# EAGLE board cpu (EAGLE 4.15)

Size 160 x 100 mm. Coordinates in mm from the lower left corner, seen from the top.
Outline: 0,0 160,0 160,100 0,100 0,0
Copper layers (1*16): Top 0.035mm / dielectric 1.5mm / Bottom 0.035mm
Design rules "default": minimum track width 10mil, minimum drill 24mil, track to track 8mil, track to pad 8mil, pad to pad 8mil, via to via 8mil, smd to smd 8mil, copper to edge 40mil, drill to drill 8mil, minimum pad ring 10mil, minimum via ring 8mil, stop-mask expansion 4mil, vias tented up to drill 0mil, thermal gap 10mil

## Footprints (pad centres in the part's own frame; a part is rotated, then mirrored left to right if it is on the bottom)
C0805K = smd 1.3 x 1.6: 1 -1,0; 2 1,0
CAP2.5 = drill 0.813 pad 1.6 octagon: 1 -2.54,0; 2 0,0
C1206 = smd 1.6 x 1.8: 1 -1.4,0; 2 1.4,0
E3,5-10 = drill 0.813 pad 1.6 round: + -1.778,0 | drill 0.813 pad 1.6 octagon: - 1.778,0
UPT = smd 1.27 x 0.762: P$1 0,2.413 | smd 2.54 x 2.667: P$2 0,0
DO214AC = smd 1.8 x 1.7: A 2.05,0; C -2.05,0
SMB = smd 2.4 x 2.4: A 2.2,0; C -2.2,0
SOT23 = smd 1 x 1.4: 1 -0.95,-1.1; 2 0.95,-1.1; 3 0,1.1
T_FILTER = smd 2.54 x 2.54: P$1 0,0 | smd 1.905 x 1.905: P$2 -2.794,0; P$3 2.794,0
CR2032V = drill 1.321 pad 3.15 octagon: + -2.54,-5.08; +@1 -2.54,5.08; - 2.286,0
DIL04B = drill 0.813 octagon: 1 -1.27,-5.08; 2 1.27,-5.08; 3 1.27,5.08; 4 -1.27,5.08
DC_DC_TRACO_1W_DUAL = drill 0.9 round: 1 -5.08,3.81; 2 -2.54,3.81; 3 2.54,3.81; 4 5.08,3.81; 5 7.62,3.81
SO14 = smd 0.66 x 2.032: 1 -3.81,-3.073; 2 -2.54,-3.073; 3 -1.27,-3.073; 4 0,-3.073; 5 1.27,-3.073; 6 2.54,-3.073; 7 3.81,-3.073; 8 3.81,3.073; 9 2.54,3.073; 10 1.27,3.073; 11 0,3.073; 12 -1.27,3.073; 13 -2.54,3.073; 14 -3.81,3.073
TQFP-32 = smd 1.27 x 0.559: 1 -4.293,2.743; 2 -4.293,1.956; 3 -4.293,1.168; 4 -4.293,0.381; 5 -4.293,-0.381; 6 -4.293,-1.168; 7 -4.293,-1.956; 8 -4.293,-2.743; 17 4.293,-2.743; 18 4.293,-1.956; 19 4.293,-1.168; 20 4.293,-0.381; 21 4.293,0.381; 22 4.293,1.168; 23 4.293,1.956; 24 4.293,2.743 | smd 0.559 x 1.27: 9 -2.743,-4.293; 10 -1.956,-4.293; 11 -1.168,-4.293; 12 -0.381,-4.293; 13 0.381,-4.293; 14 1.168,-4.293; 15 1.956,-4.293; 16 2.743,-4.293; 25 2.743,4.293; 26 1.956,4.293; 27 1.168,4.293; 28 0.381,4.293; 29 -0.381,4.293; 30 -1.168,4.293; 31 -1.956,4.293; 32 -2.743,4.293
SO14' = smd 0.6 x 2.2: 1 -3.81,-2.6; 2 -2.54,-2.6; 3 -1.27,-2.6; 4 0,-2.6; 5 1.27,-2.6; 6 2.54,-2.6; 7 3.81,-2.6; 8 3.81,2.6; 9 2.54,2.6; 10 1.27,2.6; 11 0,2.6; 12 -1.27,2.6; 13 -2.54,2.6; 14 -3.81,2.6
SOT23-5 = smd 0.6 x 1.2: 1 -0.95,-1.306; 2 0,-1.306; 3 0.95,-1.306; 4 0.95,1.306; 5 -0.95,1.306
SO16 = smd 0.66 x 2.032: 1 -4.445,-3.073; 2 -3.175,-3.073; 3 -1.905,-3.073; 4 -0.635,-3.073; 5 0.635,-3.073; 6 1.905,-3.073; 7 3.175,-3.073; 8 4.445,-3.073; 9 4.445,3.073; 10 3.175,3.073; 11 1.905,3.073; 12 0.635,3.073; 13 -0.635,3.073; 14 -1.905,3.073; 15 -3.175,3.073; 16 -4.445,3.073
LQFP32 = smd 0.4 x 1.2: 1 -2.8,-4.3; 2 -2,-4.3; 3 -1.2,-4.3; 4 -0.4,-4.3; 5 0.4,-4.3; 6 1.2,-4.3; 7 2,-4.3; 8 2.8,-4.3; 17 2.8,4.3; 18 2,4.3; 19 1.2,4.3; 20 0.4,4.3; 21 -0.4,4.3; 22 -1.2,4.3; 23 -2,4.3; 24 -2.8,4.3 | smd 1.2 x 0.4: 9 4.3,-2.8; 10 4.3,-2; 11 4.3,-1.2; 12 4.3,-0.4; 13 4.3,0.4; 14 4.3,1.2; 15 4.3,2; 16 4.3,2.8; 25 -4.3,2.8; 26 -4.3,2; 27 -4.3,1.2; 28 -4.3,0.4; 29 -4.3,-0.4; 30 -4.3,-1.2; 31 -4.3,-2; 32 -4.3,-2.8
DIL_TRACO_DCDC = drill 0.813 long: 1 -13.97,-7.62; 2 -11.43,-7.62; 3 -8.89,-7.62; 9 6.35,-7.62; 10 8.89,-7.62; 11 11.43,-7.62; 12 13.97,-7.62; 13 13.97,7.62; 14 11.43,7.62; 15 8.89,7.62; 16 6.35,7.62; 22 -8.89,7.62; 23 -11.43,7.62; 24 -13.97,7.62
DIL_NMSC_DCDC = drill 0.813 long: 1 -13.97,-7.62; 2 -11.43,-7.62; 8 3.81,-7.62; 9 6.35,-7.62; 10 8.89,-7.62; 11 11.43,-7.62; 12 13.97,-7.62; 13 13.97,7.62; 14 11.43,7.62; 15 8.89,7.62; 16 6.35,7.62; 17 3.81,7.62; 23 -11.43,7.62; 24 -13.97,7.62
SO-08 = smd 0.6 x 2.2: 1 -1.905,-2.6; 2 -0.635,-2.6; 3 0.635,-2.6; 4 1.905,-2.6; 5 1.905,2.6; 6 0.635,2.6; 7 -0.635,2.6; 8 -1.905,2.6
SO8 = smd 0.6 x 2.2: 1 -1.905,-2.6; 2 -0.635,-2.6; 3 0.635,-2.6; 4 1.905,-2.6; 5 1.905,2.6; 6 0.635,2.6; 7 -0.635,2.6; 8 -1.905,2.6
SO20W = smd 0.66 x 2.032: 1 -5.715,-5.029; 2 -4.445,-5.029; 3 -3.175,-5.029; 4 -1.905,-5.029; 5 -0.635,-5.029; 6 0.635,-5.029; 7 1.905,-5.029; 8 3.175,-5.029; 9 4.445,-5.029; 10 5.715,-5.029; 11 5.715,5.029; 12 4.445,5.029; 13 3.175,5.029; 14 1.905,5.029; 15 0.635,5.029; 16 -0.635,5.029; 17 -1.905,5.029; 18 -3.175,5.029; 19 -4.445,5.029; 20 -5.715,5.029
JP2Q = drill 0.914 octagon: 1 -1.27,-1.27; 2 -1.27,1.27; 3 1.27,-1.27; 4 1.27,1.27
JUMPER3 = drill 0.914 octagon: 1 -2.54,-1.27; 2 0,-1.27; 3 2.54,-1.27
MA03-2 = drill 1.016 round: 1 -2.54,-1.27 | drill 1.016 octagon: 2 -2.54,1.27; 3 0,-1.27; 4 0,1.27; 5 2.54,-1.27; 6 2.54,1.27
JP4 = drill 0.914 long: 1 -3.81,0; 2 -1.27,0; 3 1.27,0; 4 3.81,0
SNR-V = drill 1.3 round: 11 7.62,1.27; 12 2.54,1.27; 14 12.7,1.27 | drill 1 round: A1 -12.7,1.27; A2 -8.89,1.27
GN-A = smd 0.8 x 3.1: 1 -3.835,-2.65; 2 -0.635,-2.65; 3 1.565,-2.65; 4 3.765,-2.65; 5 3.765,2.65; 6 1.565,2.65; 7 -0.635,2.65; 8 -3.835,2.65
C1210 = smd 1.6 x 2.7: 1 -2.67,2.54; 2 0.13,2.54
IND_BLM = smd 1.27 x 1.27: P$1 -1.143,0; P$2 1.143,0
L5650M = smd 1.8 x 4: 1 -2.5,0; 2 2.5,0
CHIPLED_1206 = smd 1.5 x 1.5: A 0,-1.75; C 0,1.75
L02P = drill 1.016 long: 1 1.25,-6.25; 2 -1.25,-6.25
L04P = drill 1.016 long: 1 3.75,-6.25; 2 1.25,-6.25; 3 -1.25,-6.25; 4 -3.75,-6.25
MODU30 = drill 1 square: 1 22.86,-5.08 | drill 1 round: 2 20.32,-5.08; 3 17.78,-5.08; 4 15.24,-5.08; 5 12.7,-5.08; 6 10.16,-5.08; 7 7.62,-5.08; 8 5.08,-5.08; 9 2.54,-5.08; 10 0,-5.08; 11 -2.54,-5.08; 12 -5.08,-5.08; 13 -7.62,-5.08; 14 -10.16,-5.08; 15 -12.7,-5.08; 16 22.86,-2.54; 17 20.32,-2.54; 18 17.78,-2.54; 19 15.24,-2.54; 20 12.7,-2.54; 21 10.16,-2.54; 22 7.62,-2.54; 23 5.08,-2.54; 24 2.54,-2.54; 25 0,-2.54; 26 -2.54,-2.54; 27 -5.08,-2.54; 28 -7.62,-2.54; 29 -10.16,-2.54; 30 -12.7,-2.54
90-2 = drill 1.422 long: 1 -1.75,5.25; 2 1.75,5.25
MODU16 = drill 1 square: P$1 13.97,-5.08 | drill 1 round: P$2 11.43,-5.08; P$3 8.89,-5.08; P$4 6.35,-5.08; P$5 3.81,-5.08; P$6 1.27,-5.08; P$7 -1.27,-5.08; P$8 -3.81,-5.08; P$13 13.97,-2.54; P$14 11.43,-2.54; P$15 8.89,-2.54; P$16 6.35,-2.54; P$17 3.81,-2.54; P$18 1.27,-2.54; P$19 -1.27,-2.54; P$20 -3.81,-2.54
MODU44 = drill 1 square: P$1 0,0 | drill 1 round: P$2 -2.54,0; P$3 -5.08,0; P$4 -7.62,0; P$5 -10.16,0; P$6 -12.7,0; P$7 -15.24,0; P$8 -17.78,0; P$9 -20.32,0; P$10 -22.86,0; P$11 -25.4,0; P$12 -27.94,0; P$13 -30.48,0; P$14 -33.02,0; P$15 -35.56,0; P$16 -38.1,0; P$17 -40.64,0; P$18 -43.18,0; P$19 -45.72,0; P$20 -48.26,0; P$21 -50.8,0; P$22 -53.34,0; P$23 0,2.54; P$24 -2.54,2.54; P$25 -5.08,2.54; P$26 -7.62,2.54; P$27 -10.16,2.54; P$28 -12.7,2.54; P$29 -15.24,2.54; P$30 -17.78,2.54; P$31 -20.32,2.54; P$32 -22.86,2.54; P$33 -25.4,2.54; P$34 -27.94,2.54; P$35 -30.48,2.54; P$36 -33.02,2.54; P$37 -35.56,2.54; P$38 -38.1,2.54; P$39 -40.64,2.54; P$40 -43.18,2.54; P$41 -45.72,2.54; P$42 -48.26,2.54; P$43 -50.8,2.54; P$44 -53.34,2.54
AMP390113-1 = smd 0.5 x 2: 1 -30.5,-12.99; 2 -29.7,-12.99; 3 -28.9,-12.99; 4 -28.1,-12.99; 5 -27.3,-12.99; 6 -26.5,-12.99; 7 -25.7,-12.99; 8 -24.9,-12.99; 9 -24.1,-12.99; 10 -23.3,-12.99; 11 -22.5,-12.99; 12 -21.7,-12.99; 13 -20.9,-12.99; 14 -20.1,-12.99; 15 -19.3,-12.99; 16 -18.5,-12.99; 17 -17.7,-12.99; 18 -16.9,-12.99; 19 -16.1,-12.99; 20 -15.3,-12.99; 21 -14.5,-12.99; 22 -13.7,-12.99; 23 -12.9,-12.99; 24 -12.1,-12.99; 25 -11.3,-12.99; 26 -10.5,-12.99; 27 -9.7,-12.99; 28 -8.9,-12.99; 29 -8.1,-12.99; 30 -7.3,-12.99; 31 -2.7,-12.99; 32 -1.9,-12.99; 33 -1.1,-12.99; 34 -0.3,-12.99; 35 0.5,-12.99; 36 1.3,-12.99; 37 2.1,-12.99; 38 2.9,-12.99; 39 3.7,-12.99; 40 4.5,-12.99; 41 5.3,-12.99; 42 6.1,-12.99; 43 6.9,-12.99; 44 7.7,-12.99; 45 8.5,-12.99; 46 9.3,-12.99; 47 10.1,-12.99; 48 10.9,-12.99; 49 11.7,-12.99; 50 12.5,-12.99; 51 13.3,-12.99; 52 14.1,-12.99; 53 14.9,-12.99; 54 15.7,-12.99; 55 16.5,-12.99; 56 17.3,-12.99; 57 18.1,-12.99; 58 18.9,-12.99; 59 19.7,-12.99; 60 20.5,-12.99; 61 21.3,-12.99; 62 22.1,-12.99; 63 22.9,-12.99; 64 23.7,-12.99; 65 24.5,-12.99; 66 25.3,-12.99; 67 26.1,-12.99; 68 26.9,-12.99; 69 27.7,-12.99; 70 28.5,-12.99; 71 29.3,-12.99; 72 30.1,-12.99; 73 -30.1,-4.79; 74 -29.3,-4.79; 75 -28.5,-4.79; 76 -27.7,-4.79; 77 -26.9,-4.79; 78 -26.1,-4.79; 79 -25.3,-4.79; 80 -24.5,-4.79; 81 -23.7,-4.79; 82 -22.9,-4.79; 83 -22.1,-4.79; 84 -21.3,-4.79; 85 -20.5,-4.79; 86 -19.7,-4.79; 87 -18.9,-4.79; 88 -18.1,-4.79; 89 -17.3,-4.79; 90 -16.5,-4.79; 91 -15.7,-4.79; 92 -14.9,-4.79; 93 -14.1,-4.79; 94 -13.3,-4.79; 95 -12.5,-4.79; 96 -11.7,-4.79; 97 -10.9,-4.79; 98 -10.1,-4.79; 99 -9.3,-4.79; 100 -8.5,-4.79; 101 -7.7,-4.79; 102 -6.9,-4.79; 103 -2.3,-4.79; 104 -1.5,-4.79; 105 -0.7,-4.79; 106 0.1,-4.79; 107 0.9,-4.79; 108 1.7,-4.79; 109 2.5,-4.79; 110 3.3,-4.79; 111 4.1,-4.79; 112 4.9,-4.79; 113 5.7,-4.79; 114 6.5,-4.79; 115 7.3,-4.79; 116 8.1,-4.79; 117 8.9,-4.79; 118 9.7,-4.79; 119 10.5,-4.79; 120 11.3,-4.79; 121 12.1,-4.79; 122 12.9,-4.79; 123 13.7,-4.79; 124 14.5,-4.79; 125 15.3,-4.79; 126 16.1,-4.79; 127 16.9,-4.79; 128 17.7,-4.79; 129 18.5,-4.79; 130 19.3,-4.79; 131 20.1,-4.79; 132 20.9,-4.79; 133 21.7,-4.79; 134 22.5,-4.79; 135 23.3,-4.79; 136 24.1,-4.79; 137 24.9,-4.79; 138 25.7,-4.79; 139 26.5,-4.79; 140 27.3,-4.79; 141 28.1,-4.79; 142 28.9,-4.79; 143 29.7,-4.79; 144 30.5,-4.79 | hole 1.6: -31.5,-8.89 | hole 1.1: 31.5,-8.89
SOT-23 = smd 0.787 x 0.889: 1 0.025,-1.016; 2 -0.94,1.016; 3 0.991,1.016
SO8-2 = smd 0.61 x 1.626: 1 -2.54,-2.54; 2 -1.27,-2.54; 3 0,-2.54; 4 1.27,-2.54; 5 1.27,3.81; 6 0,3.81; 7 -1.27,3.81; 8 -2.54,3.81
DPAK = smd 1.6 x 2.997: 1 -2.261,-4.928; 3 2.21,-4.928 | smd 4.826 x 4.191: 4 0,3.353
R0805W = smd 1.5 x 1: 1 -0.94,0; 2 0.94,0
R2010W = smd 2 x 1.8: 1 -2.311,0; 2 2.311,0
NS9360 = smd 0.762 x 0.762: A1 0,0; A2 0,-1.27; A3 0,-2.54; A4 0,-3.81; A5 0,-5.08; A6 0,-6.35; A7 0,-7.62; A8 0,-8.89; A9 0,-10.16; A10 0,-11.43; A11 0,-12.7; A12 0,-13.97; A13 0,-15.24; A14 0,-16.51; A15 0,-17.78; A16 0,-19.05; A17 0,-20.32; A18 0,-21.59; A19 0,-22.86; A20 0,-24.13; B1 -1.27,0; B2 -1.27,-1.27; B3 -1.27,-2.54; B4 -1.27,-3.81; B5 -1.27,-5.08; B6 -1.27,-6.35; B7 -1.27,-7.62; B8 -1.27,-8.89; B9 -1.27,-10.16; B10 -1.27,-11.43; B11 -1.27,-12.7; B12 -1.27,-13.97; B13 -1.27,-15.24; B14 -1.27,-16.51; B15 -1.27,-17.78; B16 -1.27,-19.05; B17 -1.27,-20.32; B18 -1.27,-21.59; B19 -1.27,-22.86; B20 -1.27,-24.13; C1 -2.54,0; C2 -2.54,-1.27; C3 -2.54,-2.54; C4 -2.54,-3.81; C5 -2.54,-5.08; C6 -2.54,-6.35; C7 -2.54,-7.62; C8 -2.54,-8.89; C9 -2.54,-10.16; C10 -2.54,-11.43; C11 -2.54,-12.7; C12 -2.54,-13.97; C13 -2.54,-15.24; C14 -2.54,-16.51; C15 -2.54,-17.78; C16 -2.54,-19.05; C17 -2.54,-20.32; C18 -2.54,-21.59; C19 -2.54,-22.86; C20 -2.54,-24.13; D1 -3.81,0; D2 -3.81,-1.27; D3 -3.81,-2.54; D4 -3.81,-3.81; D5 -3.81,-5.08; D6 -3.81,-6.35; D7 -3.81,-7.62; D8 -3.81,-8.89; D9 -3.81,-10.16; D10 -3.81,-11.43; D11 -3.81,-12.7; D12 -3.81,-13.97; D13 -3.81,-15.24; D14 -3.81,-16.51; D15 -3.81,-17.78; D16 -3.81,-19.05; D17 -3.81,-20.32; D18 -3.81,-21.59; D19 -3.81,-22.86; D20 -3.81,-24.13; E1 -5.08,0; E2 -5.08,-1.27; E3 -5.08,-2.54; E4 -5.08,-3.81; E17 -5.08,-20.32; E18 -5.08,-21.59; E19 -5.08,-22.86; E20 -5.08,-24.13; F1 -6.35,0; F2 -6.35,-1.27; F3 -6.35,-2.54; F4 -6.35,-3.81; F17 -6.35,-20.32; F18 -6.35,-21.59; F19 -6.35,-22.86; F20 -6.35,-24.13; G1 -7.62,0; G2 -7.62,-1.27; G3 -7.62,-2.54; G4 -7.62,-3.81; G17 -7.62,-20.32; G18 -7.62,-21.59; G19 -7.62,-22.86; G20 -7.62,-24.13; H1 -8.89,0; H2 -8.89,-1.27; H3 -8.89,-2.54; H4 -8.89,-3.81; H17 -8.89,-20.32; H18 -8.89,-21.59; H19 -8.89,-22.86; H20 -8.89,-24.13; J1 -10.16,0; J2 -10.16,-1.27; J3 -10.16,-2.54; J4 -10.16,-3.81; J9 -10.16,-10.16; J10 -10.16,-11.43; J11 -10.16,-12.7; J12 -10.16,-13.97; J17 -10.16,-20.32; J18 -10.16,-21.59; J19 -10.16,-22.86; J20 -10.16,-24.13; K1 -11.43,0; K2 -11.43,-1.27; K3 -11.43,-2.54; K4 -11.43,-3.81; K9 -11.43,-10.16; K10 -11.43,-11.43; K11 -11.43,-12.7; K12 -11.43,-13.97; K17 -11.43,-20.32; K18 -11.43,-21.59; K19 -11.43,-22.86; K20 -11.43,-24.13; L1 -12.7,0; L2 -12.7,-1.27; L3 -12.7,-2.54; L4 -12.7,-3.81; L9 -12.7,-10.16; L10 -12.7,-11.43; L11 -12.7,-12.7; L12 -12.7,-13.97; L17 -12.7,-20.32; L18 -12.7,-21.59; L19 -12.7,-22.86; L20 -12.7,-24.13; M1 -13.97,0; M2 -13.97,-1.27; M3 -13.97,-2.54; M4 -13.97,-3.81; M9 -13.97,-10.16; M10 -13.97,-11.43; M11 -13.97,-12.7; M12 -13.97,-13.97; M17 -13.97,-20.32; M18 -13.97,-21.59; M19 -13.97,-22.86; M20 -13.97,-24.13; N1 -15.24,0; N2 -15.24,-1.27; N3 -15.24,-2.54; N4 -15.24,-3.81; N17 -15.24,-20.32; N18 -15.24,-21.59; N19 -15.24,-22.86; N20 -15.24,-24.13; P1 -16.51,0; P2 -16.51,-1.27; P3 -16.51,-2.54; P4 -16.51,-3.81; P17 -16.51,-20.32; P18 -16.51,-21.59; P19 -16.51,-22.86; P20 -16.51,-24.13; R1 -17.78,0; R2 -17.78,-1.27; R3 -17.78,-2.54; R4 -17.78,-3.81; R17 -17.78,-20.32; R18 -17.78,-21.59; R19 -17.78,-22.86; R20 -17.78,-24.13; T1 -19.05,0; T2 -19.05,-1.27; T3 -19.05,-2.54; T4 -19.05,-3.81; T17 -19.05,-20.32; T18 -19.05,-21.59; T19 -19.05,-22.86; T20 -19.05,-24.13; U1 -20.32,0; U2 -20.32,-1.27; U3 -20.32,-2.54; U4 -20.32,-3.81; U5 -20.32,-5.08; U6 -20.32,-6.35; U7 -20.32,-7.62; U8 -20.32,-8.89; U9 -20.32,-10.16; U10 -20.32,-11.43; U11 -20.32,-12.7; U12 -20.32,-13.97; U13 -20.32,-15.24; U14 -20.32,-16.51; U15 -20.32,-17.78; U16 -20.32,-19.05; U17 -20.32,-20.32; U18 -20.32,-21.59; U19 -20.32,-22.86; U20 -20.32,-24.13; V1 -21.59,0; V2 -21.59,-1.27; V3 -21.59,-2.54; V4 -21.59,-3.81; V5 -21.59,-5.08; V6 -21.59,-6.35; V7 -21.59,-7.62; V8 -21.59,-8.89; V9 -21.59,-10.16; V10 -21.59,-11.43; V11 -21.59,-12.7; V12 -21.59,-13.97; V13 -21.59,-15.24; V14 -21.59,-16.51; V15 -21.59,-17.78; V16 -21.59,-19.05; V17 -21.59,-20.32; V18 -21.59,-21.59; V19 -21.59,-22.86; V20 -21.59,-24.13; W1 -22.86,0; W2 -22.86,-1.27; W3 -22.86,-2.54; W4 -22.86,-3.81; W5 -22.86,-5.08; W6 -22.86,-6.35; W7 -22.86,-7.62; W8 -22.86,-8.89; W9 -22.86,-10.16; W10 -22.86,-11.43; W11 -22.86,-12.7; W12 -22.86,-13.97; W13 -22.86,-15.24; W14 -22.86,-16.51; W15 -22.86,-17.78; W16 -22.86,-19.05; W17 -22.86,-20.32; W18 -22.86,-21.59; W19 -22.86,-22.86; W20 -22.86,-24.13; Y1 -24.13,0; Y2 -24.13,-1.27; Y3 -24.13,-2.54; Y4 -24.13,-3.81; Y5 -24.13,-5.08; Y6 -24.13,-6.35; Y7 -24.13,-7.62; Y8 -24.13,-8.89; Y9 -24.13,-10.16; Y10 -24.13,-11.43; Y11 -24.13,-12.7; Y12 -24.13,-13.97; Y13 -24.13,-15.24; Y14 -24.13,-16.51; Y15 -24.13,-17.78; Y16 -24.13,-19.05; Y17 -24.13,-20.32; Y18 -24.13,-21.59; Y19 -24.13,-22.86; Y20 -24.13,-24.13
MURATA_RESONATOR = smd 0.8 x 2.6: 1 -1.5,0; 2 0,0; 3 1.5,0
MM20SS = smd 1.27 x 1.88: 1 -2.794,-1.524; 2 2.794,-1.524; 3 2.794,1.524; 4 -2.794,1.524

## Placement (x,y rotation side)
C1  100n  [C0805K]  not placed on the board
C2  100n  [C0805K]  not placed on the board
C3  100n  [C0805K]  not placed on the board
C4  100n  [C0805K]  not placed on the board
C5  100n  [C0805K]  not placed on the board
C6  100n  [C0805K]  not placed on the board
C7  100n  [C0805K]  not placed on the board
C8  47u/25V  [CAP2.5]  not placed on the board
C9  100n  [C0805K]  not placed on the board
C10  100n  [C0805K]  not placed on the board
C11  100n  [C1206]  not placed on the board
C12  NM  [C0805K]  not placed on the board
C13  100n  [C0805K]  not placed on the board
C14  47u/25V  [CAP2.5]  not placed on the board
C15  47u/25V  [CAP2.5]  not placed on the board
C16  100n  [C0805K]  not placed on the board
C17  100n  [C0805K]  not placed on the board
C18  100n  [C0805K]  not placed on the board
C19  1u0  [C0805K]  not placed on the board
C20  100n  [C1206]  not placed on the board
C21  100n  [C1206]  not placed on the board
C22  100n  [C1206]  not placed on the board
C23  100n  [C0805K]  not placed on the board
C24  100n  [C0805K]  not placed on the board
C25  47u/25V  [CAP2.5]  not placed on the board
C26  100n  [C0805K]  not placed on the board
C27  47u/50V  [CAP2.5]  not placed on the board
C28  100n  [C0805K]  not placed on the board
C29  100n  [C0805K]  not placed on the board
C30  100n  [C0805K]  not placed on the board
C31  100n  [C1206]  not placed on the board
C32  100n  [C0805K]  not placed on the board
C33  100n  [C0805K]  not placed on the board
C34  100n  [C0805K]  not placed on the board
C35  100n  [C0805K]  not placed on the board
C36  100n  [C0805K]  not placed on the board
C37  100n  [C0805K]  not placed on the board
C38  100n  [C0805K]  not placed on the board
C39  100n  [C1206]  not placed on the board
C40  100n  [C0805K]  not placed on the board
C41  47u/25V  [CAP2.5]  not placed on the board
C42  100n  [C1206]  not placed on the board
C43  100n  [C0805K]  not placed on the board
C44  NM  [C1206]  not placed on the board
C45  330uF  [E3,5-10]  not placed on the board
C46  180uF  [E3,5-10]  not placed on the board
C47  100n  [C0805K]  not placed on the board
C48  100n  [C0805K]  not placed on the board
C49  47u/25V  [CAP2.5]  not placed on the board
C50  470p  [C1206]  not placed on the board
C51  100n  [C0805K]  not placed on the board
C52  220p  [C1206]  not placed on the board
C53  470p  [C1206]  not placed on the board
C54  100p  [C1206]  not placed on the board
C55  100n  [C0805K]  not placed on the board
C57  NM  [C0805K]  not placed on the board
C58  NM  [C0805K]  not placed on the board
C59  100n  [C0805K]  not placed on the board
C60  470n  [C0805K]  not placed on the board
C61  NM  [C0805K]  not placed on the board
C62  100p  [C0805K]  not placed on the board
C63  1u0  [C0805K]  not placed on the board
C64  1u0  [C0805K]  not placed on the board
C65  100p  [C0805K]  not placed on the board
C66  100n  [C0805K]  not placed on the board
C67  100n  [C0805K]  not placed on the board
C68  100n  [C0805K]  not placed on the board
C69  100n  [C0805K]  not placed on the board
C70  100n  [C0805K]  not placed on the board
C71  100n  [C0805K]  not placed on the board
C72  1u0  [C0805K]  not placed on the board
C73  1u0  [C0805K]  not placed on the board
C74  100p  [C0805K]  not placed on the board
C75  100p  [C0805K]  not placed on the board
C76  100n  [C0805K]  not placed on the board
C77  NM  [C0805K]  not placed on the board
C78  100n  [C0805K]  not placed on the board
C79  NM  [C0805K]  not placed on the board
C80  470n  [C0805K]  not placed on the board
D1  UPT  [UPT]  not placed on the board
D2  UPT  [UPT]  not placed on the board
D3  S1K  [DO214AC]  not placed on the board
D4  SM6T  [SMB]  not placed on the board
D5  BZX84-C12  [SOT23]  not placed on the board
D6  S1K  [DO214AC]  not placed on the board
D7  S1K  [DO214AC]  not placed on the board
D8  S1K  [DO214AC]  not placed on the board
D9  S1K  [DO214AC]  not placed on the board
D10  S1K  [DO214AC]  not placed on the board
D11  S1K  [DO214AC]  not placed on the board
D12  S1K  [DO214AC]  not placed on the board
D13  UPT  [UPT]  not placed on the board
D14  SM6T  [SMB]  not placed on the board
D15  SM6T  [SMB]  not placed on the board
D16  SM6T  [SMB]  not placed on the board
D17  SM6T  [SMB]  not placed on the board
D18  BAS16  [SOT23]  not placed on the board
D19  UPT  [UPT]  not placed on the board
D20  SM6T  [SMB]  not placed on the board
D21  SM6T  [SMB]  not placed on the board
D22  BAS16  [SOT23]  not placed on the board
D23  BAS16  [SOT23]  not placed on the board
D24  SM6T  [SMB]  not placed on the board
D25  BAS16  [SOT23]  not placed on the board
D26  BAS16  [SOT23]  not placed on the board
D27  BAS16  [SOT23]  not placed on the board
D28  BAS16  [SOT23]  not placed on the board
D29  BAS16  [SOT23]  not placed on the board
D30  SM6T  [SMB]  not placed on the board
F1  [T_FILTER]  not placed on the board
F2  [T_FILTER]  not placed on the board
F3  [T_FILTER]  not placed on the board
F4  [T_FILTER]  not placed on the board
G1  CR2032V  [CR2032V]  not placed on the board
IC1  SFH617G  [DIL04B]  not placed on the board
IC2  SFH617G  [DIL04B]  not placed on the board
IC3  SFH617G  [DIL04B]  not placed on the board
IC4  SFH617G  [DIL04B]  not placed on the board
IC5  DC_DC_TRACO_1W_DUAL  [DC_DC_TRACO_1W_DUAL]  not placed on the board
IC6  74HCT14D  [SO14]  not placed on the board
IC7  SFH617G  [DIL04B]  not placed on the board
IC8  ATMEGA8_TQFP  [TQFP-32]  not placed on the board
IC9  SFH617G  [DIL04B]  not placed on the board
IC10  OP747AR  [SO14']  not placed on the board
IC11  74HCT14D  [SO14]  not placed on the board
IC12  LM4120  [SOT23-5]  not placed on the board
IC13  74HC02D  [SO14]  not placed on the board
IC14  74HCT14D  [SO14]  not placed on the board
IC15  MAX232A  [SO16]  not placed on the board
IC16  MAX232A  [SO16]  not placed on the board
IC17  FT232BM  [LQFP32]  not placed on the board
IC18  DC_DC_TRACO_8W  [DIL_TRACO_DCDC]  not placed on the board
IC19  DC_DC_NMSC  [DIL_NMSC_DCDC]  not placed on the board
IC20  74HCT253D  [SO16]  not placed on the board
IC21  93LC66SN  [SO-08]  not placed on the board
IC22  LTC1622  [SO8]  not placed on the board
IC23  M41T81  [SO8]  not placed on the board
IC24  74HCT573D  [SO20W]  not placed on the board
IC27  ATMEGA8_TQFP  [TQFP-32]  not placed on the board
IC28  OP747R  [SO14']  not placed on the board
IC29  LM339D  [SO14']  not placed on the board
IC30  24AA64SN  [SO-08]  not placed on the board
J1  [JP2Q]  not placed on the board
J2  JUMPER3  [JUMPER3]  not placed on the board
J3  [MA03-2]  not placed on the board
J4  JUMPER3  [JUMPER3]  not placed on the board
J5  JUMPER3  [JUMPER3]  not placed on the board
J6  [JP4]  not placed on the board
J7  [JP4]  not placed on the board
J8  [MA03-2]  not placed on the board
K2  SNR03024  [SNR-V]  not placed on the board
K4  SNR03024  [SNR-V]  not placed on the board
K5  GN200A1H  [GN-A]  not placed on the board
K6  GN200A1H  [GN-A]  not placed on the board
L1  L1210  [C1210]  not placed on the board
L2  IND_BLM  [IND_BLM]  not placed on the board
L3  L1210  [C1210]  not placed on the board
L4  IND_BLM  [IND_BLM]  not placed on the board
L5  IND_BLM  [IND_BLM]  not placed on the board
L6  IND_BLM  [IND_BLM]  not placed on the board
L7  IND_BLM  [IND_BLM]  not placed on the board
L8  IND_BLM  [IND_BLM]  not placed on the board
L9  IND_BLM  [IND_BLM]  not placed on the board
L10  L1210  [C1210]  not placed on the board
L11  [L5650M]  not placed on the board
L12  L1210  [C1210]  not placed on the board
LED1  [CHIPLED_1206]  not placed on the board
LED2  [CHIPLED_1206]  not placed on the board
P1  [L02P]  not placed on the board
P2  [L04P]  not placed on the board
P3  [MODU30]  not placed on the board
P4  [90-2]  not placed on the board
P5  [MODU16]  not placed on the board
P6  [MODU44]  not placed on the board
P7  AMP390113-1  [AMP390113-1]  not placed on the board
P8  [MODU16]  not placed on the board
Q1  BSS123  [SOT23]  not placed on the board
Q2  BSS123  [SOT23]  not placed on the board
Q3  IRF7471  [SO8]  not placed on the board
Q4  BC847  [SOT-23]  not placed on the board
Q5  IRF7103  [SO8-2]  not placed on the board
Q6  IRF7103  [SO8-2]  not placed on the board
Q7  IRF7471  [SO8]  not placed on the board
Q8  IRF7103  [SO8-2]  not placed on the board
Q9  IRFR5305  [DPAK]  not placed on the board
Q10  BSS123  [SOT23]  not placed on the board
Q11  BSS123  [SOT23]  not placed on the board
Q12  FDV304P  [SOT23]  not placed on the board
Q13  BSS123  [SOT23]  not placed on the board
Q14  BSS123  [SOT23]  not placed on the board
Q15  IRF7422  [SO8]  not placed on the board
Q29  BSS123  [SOT23]  not placed on the board
Q30  BSS123  [SOT23]  not placed on the board
Q31  BSS123  [SOT23]  not placed on the board
Q32  BSS123  [SOT23]  not placed on the board
R1  470R  [R0805W]  not placed on the board
R2  470R  [R0805W]  not placed on the board
R3  2K21  [R0805W]  not placed on the board
R4  10k  [R0805W]  not placed on the board
R5  10k  [R0805W]  not placed on the board
R7  0R  [R0805W]  not placed on the board
R8  0R  [R0805W]  not placed on the board
R9  [R0805W]  not placed on the board
R11  0R  [R0805W]  not placed on the board
R13  100R  [R0805W]  not placed on the board
R14  10K  [R0805W]  not placed on the board
R15  10K  [R0805W]  not placed on the board
R16  100R  [R0805W]  not placed on the board
R17  10K  [R0805W]  not placed on the board
R18  100R  [R0805W]  not placed on the board
R19  4K75  [R0805W]  not placed on the board
R20  100R  [R0805W]  not placed on the board
R21  2K21  [R0805W]  not placed on the board
R22  2K21  [R0805W]  not placed on the board
R23  470R  [R0805W]  not placed on the board
R24  10k  [R0805W]  not placed on the board
R25  10k  [R0805W]  not placed on the board
R26  10k  [R0805W]  not placed on the board
R27  0R  [R0805W]  not placed on the board
R28  [R0805W]  not placed on the board
R29  470R  [R0805W]  not placed on the board
R30  100k  [R0805W]  not placed on the board
R31  1K  [R0805W]  not placed on the board
R32  2K21  [R0805W]  not placed on the board
R33  10k  [R0805W]  not placed on the board
R34  10k  [R0805W]  not placed on the board
R35  10k  [R0805W]  not placed on the board
R36  470R  [R0805W]  not placed on the board
R37  10k  [R0805W]  not placed on the board
R38  100R  [R0805W]  not placed on the board
R39  100R  [R0805W]  not placed on the board
R40  1K  [R0805W]  not placed on the board
R41  1K  [R0805W]  not placed on the board
R42  10k  [R0805W]  not placed on the board
R43  2K21  [R0805W]  not placed on the board
R44  3K3  [R0805W]  not placed on the board
R45  1K  [R0805W]  not placed on the board
R46  100R  [R0805W]  not placed on the board
R47  10k  [R0805W]  not placed on the board
R48  1k  [R0805W]  not placed on the board
R49  10K  [R0805W]  not placed on the board
R50  10k  [R0805W]  not placed on the board
R51  [R0805W]  not placed on the board
R52  2k2  [R0805W]  not placed on the board
R53  2K21  [R0805W]  not placed on the board
R54  100R  [R0805W]  not placed on the board
R55  1K  [R0805W]  not placed on the board
R56  220K  [R0805W]  not placed on the board
R57  220K  [R0805W]  not placed on the board
R58  10k  [R0805W]  not placed on the board
R59  470R  [R0805W]  not placed on the board
R60  10K  [R0805W]  not placed on the board
R61  4K75  [R0805W]  not placed on the board
R62  4K75  [R0805W]  not placed on the board
R63  4K75  [R0805W]  not placed on the board
R64  4K75  [R0805W]  not placed on the board
R65  10k  [R0805W]  not placed on the board
R66  100R  [R0805W]  not placed on the board
R67  220K  [R0805W]  not placed on the board
R68  1K  [R0805W]  not placed on the board
R69  1K  [R0805W]  not placed on the board
R70  220K  [R0805W]  not placed on the board
R71  100R  [R0805W]  not placed on the board
R72  100R  [R0805W]  not placed on the board
R73  1K  [R0805W]  not placed on the board
R74  1K  [R0805W]  not placed on the board
R75  220K  [R0805W]  not placed on the board
R76  220K  [R0805W]  not placed on the board
R77  1K  [R0805W]  not placed on the board
R78  100R  [R0805W]  not placed on the board
R79  137R  [R0805W]  not placed on the board
R80  10k  [R0805W]  not placed on the board
R81  1K  [R0805W]  not placed on the board
R82  137R  [R0805W]  not placed on the board
R83  100R  [R0805W]  not placed on the board
R84  1K  [R0805W]  not placed on the board
R85  1K  [R0805W]  not placed on the board
R86  1k  [R0805W]  not placed on the board
R87  1k  [R0805W]  not placed on the board
R88  100R  [R0805W]  not placed on the board
R89  10k  [R0805W]  not placed on the board
R90  10k  [R0805W]  not placed on the board
R91  470R  [R0805W]  not placed on the board
R92  1k5  [R0805W]  not placed on the board
R93  27R  [R0805W]  not placed on the board
R94  27R  [R0805W]  not placed on the board
R95  4k7  [R0805W]  not placed on the board
R96  10k  [R0805W]  not placed on the board
R97  2k2  [R0805W]  not placed on the board
R102  2k2  [R0805W]  not placed on the board
R103  2k2  [R0805W]  not placed on the board
R104  2k2  [R0805W]  not placed on the board
R105  0R025  [R2010W]  not placed on the board
R112  10K  [R0805W]  not placed on the board
R113  1k  [R0805W]  not placed on the board
R114  2K21  [R0805W]  not placed on the board
R115  3k32  [R0805W]  not placed on the board
R116  6k81  [R0805W]  not placed on the board
R117  560k  [R0805W]  not placed on the board
R118  150k  [R0805W]  not placed on the board
R119  150k  [R0805W]  not placed on the board
R120  560k  [R0805W]  not placed on the board
R121  NM  [R0805W]  not placed on the board
R122  3k92  [R0805W]  not placed on the board
R123  NM  [R0805W]  not placed on the board
R124  3k92  [R0805W]  not placed on the board
R125  10R  [R0805W]  not placed on the board
R126  3k32  [R0805W]  not placed on the board
R127  3k32  [R0805W]  not placed on the board
R128  6k81  [R0805W]  not placed on the board
R129  2k21  [R0805W]  not placed on the board
R130  [R0805W]  not placed on the board
R131  [R0805W]  not placed on the board
R132  10R  [R0805W]  not placed on the board
R133  3k32  [R0805W]  not placed on the board
R134  3k32  [R0805W]  not placed on the board
R135  3k92  [R0805W]  not placed on the board
R136  560k  [R0805W]  not placed on the board
R137  NM  [R0805W]  not placed on the board
R138  6k81  [R0805W]  not placed on the board
R139  150k  [R0805W]  not placed on the board
R140  150k  [R0805W]  not placed on the board
R141  NM  [R0805W]  not placed on the board
R142  6k81  [R0805W]  not placed on the board
R143  3k32  [R0805W]  not placed on the board
R144  3k92  [R0805W]  not placed on the board
R145  560k  [R0805W]  not placed on the board
U$10  NS9360  [NS9360]  not placed on the board
X1  MURATA_RESONATOR  [MURATA_RESONATOR]  not placed on the board
X2  32768 Hz  [MM20SS]  not placed on the board

## Library data of the parts
C1-C7 C9-C13 C16-C24 C26 C28-C40 C42-C48 C50-C55 C57-C80 L11 R1-R5 R7-R9 R11 R13-R97 R102-R105 R112-R145 = rcl
C8 C14 C15 C25 C27 C41 C49 D1-D4 D6-D30 F1-F4 IC5 IC12 IC15 IC16 IC18 IC19 IC22 IC23 J2 J4 J5 L1-L10 L12 P3 P5-P8 Q3 Q7 Q9 Q15 U$10 X1 = lbm
D5 = diode
G1 = battery
IC1-IC4 IC7 IC9 = optocoupler
IC6 IC11 IC13 IC14 IC20 IC24 = 74xx-eu
IC8 IC27 = atmel_prototype_header
IC10 IC28 IC29 = linear
IC17 = ftdi3
IC21 IC30 = microchip
J1 J6 J7 = jumper
J3 J8 = con-lstb
K2 K4-K6 = relay
LED1 LED2 = led
P1 P2 = con-amp-mt
P4 = con-weidmueller-sl35
Q1 Q2 Q10-Q14 Q29-Q32 = transistor-small-signal
Q4 = zetex
Q5 Q6 Q8 = irf-2
X2 = crystal

## Nets
0V: C7.1 C8.2 C9.1 C11.2 C13.1 C14.2 C15.1 C17.2 C18.1 C20.2 C21.1 C22.2 C27.2 C29.2 C31.2 C35.2 C39.2 C40.1 C41.2 C42.2 C44.2 C45.- C46.- C48.1 C49.2 C50.2 C52.2 C53.2 C54.2 C55.1 C61.1 C62.1 C65.1 C66.1 C67.2 C68.2 C69.1 C70.1 C71.2 C74.1 C75.1 C78.2 D4.A D24.A D26.1 D27.1 D28.1 D29.1 D30.A G1.- IC3.3 IC4.3 IC5.2 IC5.4 IC6.7 IC7.3 IC8.3 IC8.5 IC8.21 IC10.12 IC11.7 IC12.2 IC14.7 IC16.8 IC16.10 IC16.15 IC18.2 IC18.3 IC18.10 IC18.12 IC18.13 IC18.15 IC18.16 IC19.2 IC20.1 IC20.8 IC20.13 IC20.15 IC22.6 IC23.4 IC24.1 IC24.6 IC24.7 IC24.8 IC24.9 IC24.10 IC27.3 IC27.5 IC27.21 IC29.12 IC30.1 IC30.2 IC30.4 IC30.7 J3.6 J6.4 J7.4 J8.6 P3.9 P3.11 P3.19 P3.22 P4.2 P6.P$5 P6.P$7 P6.P$9 P6.P$11 P6.P$14 P6.P$15 P6.P$16 P6.P$17 P7.1 P7.10 P7.15 P7.25 P7.30 P7.31 P7.36 P7.41 P7.47 P7.51 P7.61 P7.65 P7.67 P7.72 P7.73 P7.82 P7.87 P7.97 P7.102 P7.103 P7.108 P7.113 P7.119 P7.123 P7.133 P7.137 P7.139 P7.144 P8.P$2 P8.P$4 P8.P$8 P8.P$14 P8.P$16 Q1.2 Q2.2 Q3.1 Q3.2 Q3.3 Q4.2 Q5.1 Q5.3 Q6.1 Q6.3 Q7.1 Q7.2 Q7.3 Q8.1 Q8.3 Q10.2 Q11.2 Q13.2 Q14.2 Q15.1 Q15.2 Q29.2 Q30.2 Q31.2 Q32.2 R4.2 R7.1 R8.1 R11.1 R25.1 R27.1 R30.1 R33.1 R34.1 R35.1 R37.1 R40.2 R42.1 R47.1 R52.1 R56.1 R64.2 R73.2 R75.1 R76.1 R84.2 R104.1 R117.2 R120.2 R122.2 R124.2 R135.2 R136.2 R144.2 R145.2
+3V3: C29.1 C33.2 C39.1 C40.2 C45.+ C48.2 C71.1 C78.1 IC1.1 IC2.1 IC6.14 IC9.1 IC11.5 IC11.9 IC11.14 IC14.1 IC14.9 IC14.11 IC14.14 IC16.16 IC20.16 IC23.8 IC24.11 IC24.20 IC30.3 IC30.8 J3.2 J8.2 L3.2 L11.2 L12.2 LED1.A LED2.A P7.2 P7.3 P7.74 P7.75 R3.1 R5.1 R24.2 R32.1 R43.1 R86.2 R87.2 R103.2 R112.2 R113.2 R115.2 R116.1 R127.2 R128.1 R129.2 R130.2 R131.2 R134.2 R138.1 R142.1 R143.2
+5V: C14.1 C18.2 C20.1 C22.1 C69.2 C70.2 IC5.5 IC10.4 IC12.3 IC12.4 IC28.4 IC29.3
+24S: D3.C D6.C D7.C D8.C D9.C D10.C D11.C D12.C D18.3 D23.3 K2.11 K5.1 K6.1 P1.1 P3.12 P3.13 P3.14 P3.15 P3.23 P6.P$1 P6.P$2 P6.P$3 P6.P$4 P8.P$17
+24V: C8.1 C11.1 C27.1 C31.1 D22.3 D25.3 IC5.1 IC18.1 IC18.22 IC18.23 IC18.24 K2.14 K2.A1 K4.A1 Q9.4
-5V: C15.2 C17.1 C21.2 C67.1 C68.1 IC5.3 IC10.11 IC28.11
ADC6: IC27.19
AK_ACL: IC11.12 P7.98
AK_ADA: IC11.10 P7.99
AK_WAK: P7.23 R2.1
AK_WDA: P7.96 R1.1
ARM9_RESET: P7.53 Q30.3 R112.1
BYPASS_SOLENOID: IC8.2 Q8.4 R47.2
BYPASS_SOLENOID_DRIVE: D8.A P6.P$24 Q8.5 Q8.6
CHEM_LED: P6.P$36 R13.1
CHEM_PUMP_SOLENOID: C19.1 P7.116
CHEM_TUBE: IC6.12 P7.110
CHEM_TUBE_IN: P6.P$35 R14.2 R61.1
CLEAN_CART_SW1: P3.5 R80.2
CLEAN_CART_SW2: P3.18 R89.2
COND_ADDR0: IC20.2 P7.24
COND_ADDR1: IC20.14 P7.114
COND_CAP0: P7.21
COND_CAP1: C77.2 P7.89
COND_CAP2: P7.39
COND_CAP3: C79.2 P7.90
COND_CAP4: P7.121
COND_CAP5: C57.2 P7.88
COND_CAP6: P7.86
COND_CAP7: C58.2 P7.101
COND_SENSOR_1_OUTPUT: IC20.4 IC29.2 R134.1 R137.2
COND_SENSOR_1A: D26.3 P3.1 R125.1
COND_SENSOR_1B: P3.16 R8.2
COND_SENSOR_2_OUTPUT: IC20.3 IC29.14 R115.1 R121.2
COND_SENSOR_2A: D27.3 P3.2 R126.1
COND_SENSOR_2B: P3.17 R7.2
DISPLAY_RXD: IC16.13 P3.25
DISPLAY_TXD: IC16.14 P3.24
EXTERNAL_OUTPUT: IC8.12 Q13.1
FLOW1_FREQ: IC20.12 P3.7
FREQ_PULSE1: IC20.7 P7.35
FREQ_PULSE2: IC20.9 P7.111
HEATER_CLK: P7.56 P8.P$1
HEATER_DI: P7.37 Q32.3 R113.1
HEATER_DO: P7.55 P8.P$7
HEATER_LOAD: P7.100 P8.P$3
I2C_CLOCK: IC8.28 IC23.6 IC27.28 IC30.6 P3.27 P7.85 P8.P$20 R131.1
I2C_DATA: IC8.27 IC23.5 IC27.27 IC30.5 P3.26 P7.84 P8.P$19 R130.1
INLET_COND_OUTPUT: IC20.6 IC29.1 R141.2 R143.1
INLET_COND_SENSOR_A: D28.3 P6.P$40 R133.1
INLET_COND_SENSOR_B: P6.P$18 R11.2
INLET_SOLENOID: C12.1 IC8.15 J3.4 R46.2
INLET_VALVE_SOLENOID_DRIVE: D9.A P6.P$23 Q7.5 Q7.6 Q7.7 Q7.8
IOU_RESET: IC8.29 J3.5 Q31.3
MODULE_PRESSURE: D24.C IC8.19 P6.P$38
MODULE_TEMP: D4.C IC8.26 P6.P$37
MOTOR_PULSE: IC14.12 IC20.10
MOTOR_SPEED_OUT: P2.3 Q1.3
MOTOR_START_OUT: P2.2 Q2.3
N$1: IC10.13 IC10.14
N$2: IC27.26 R114.1
N$3: IC27.17 J8.3
N$4: C66.2 IC27.4 IC27.6 IC27.18 IC27.20 L12.1
N$5: LED2.C R114.2
N$6: C58.1 C60.1 IC28.10 R126.2
N$7: C57.1 C59.1 IC28.12 R125.2
N$8: P2.1 R26.1
N$9: C19.2 Q3.4 R30.2
N$10: C63.2 R118.1
N$11: D25.1 K2.A2 Q29.3
N$12: C62.2 IC29.4 R117.1 R118.2
N$13: IC27.29 J8.5
N$14: IC13.1 R59.2
N$15: C80.2 IC24.19
N$16: C76.2 IC24.18
N$17: C59.2 IC24.17
N$18: C60.2 IC24.16
N$19: C77.1 C80.1 IC28.5 R133.2
N$20: C76.1 C79.1 IC28.3 R132.2
N$21: J5.1 R93.2
N$22: IC13.2 IC13.3 IC13.4
N$23: IC13.5 IC15.9
N$24: IC11.1 IC11.4
N$25: C72.1 IC28.1 IC28.2
N$26: IC13.6 IC17.25 R58.1
N$27: C64.2 R119.1
N$28: C65.2 IC29.8 R119.2 R120.1
N$29: R71.2 R78.2 R84.1
N$30: IC29.5 R135.1 R137.1 R138.2
N$31: IC10.6 R70.1 R77.2
N$32: C30.2 K5.6 R77.1 R78.1
N$33: D18.1 K5.8 Q10.3
N$34: C12.2 Q7.4 R33.2 R46.1
N$36: IC14.4 P7.120
N$37: IC10.5 R69.1 R76.2
N$38: IC15.8 L4.P$2 R65.1
N$39: C30.1 R69.2 R71.1 R72.2
N$41: K5.5 R79.2
N$42: C72.2 R139.1
N$43: C75.2 IC29.10 R139.2 R145.1
N$44: IC16.12 P7.117
N$45: C23.2 IC15.1
N$46: D3.A Q3.5 Q3.6 Q3.7 Q3.8 R9.1
N$47: IC29.11 R123.1 R124.1 R128.2
N$48: P1.2 R9.2
N$49: R66.2 R73.1 R88.2
N$50: IC10.2 R67.1 R74.2
N$51: C36.2 K6.6 R66.1 R74.1
N$52: D23.1 K6.8 Q14.3
N$53: IC10.3 R68.1 R75.2
N$54: C23.1 IC15.3
N$55: C63.1 IC28.13 IC28.14
N$56: IC1.2 R1.2
N$57: C36.1 R68.2 R83.2 R88.1
N$58: IC2.2 R2.2
N$59: K6.5 R82.2
N$60: J2.1 R95.2
N$61: IC4.1 R36.1
N$62: IC3.1 R29.1
N$63: J1.2 R21.2
N$64: J1.4 R22.2
N$65: IC17.4 R90.2 R95.1
N$66: L2.P$2 P5.P$8 P5.P$14 P5.P$16
N$67: IC3.4 IC11.11 R3.2
N$68: IC4.4 IC11.13 R32.2
N$69: IC9.2 R23.2
N$70: IC9.4 IC15.10 IC17.24 R53.1
N$71: IC7.2 R59.1
N$72: K4.12 P5.P$13
N$73: K4.11 P5.P$2
N$74: K4.14 P5.P$1
N$75: J4.1 R94.2
N$77: J4.3
N$78: F4.P$2 IC4.2
N$79: IC21.4 R96.1 R97.1
N$80: IC17.2 IC21.3 R97.2
N$81: IC17.32 IC21.1
N$82: IC17.1 IC21.2
N$83: IC17.5 R92.1
N$84: C7.2 Q4.3 R25.2 R26.2
N$85: R38.2 R40.1 R54.2
N$86: IC10.9 R41.2 R57.1
N$87: C43.1 IC17.30 R91.1
N$88: C38.1 IC17.6
N$89: C26.2 IC15.4
N$90: IC10.10 R55.1 R56.2
N$91: C10.1 R38.1 R39.2 R55.2
N$92: L1.2 P2.4
N$93: D22.1 K4.A2 Q13.3
N$94: C26.1 IC15.5
N$95: C24.1 IC15.2
N$96: C28.1 IC15.6
N$97: IC29.9 R116.2 R121.1 R122.1
N$98: Q12.1 R44.2 R45.1
N$99: F2.P$2 IC2.4 R22.1
N$100: IC16.11 P7.118
N$101: C9.2 IC8.4 IC8.6 IC8.18 L3.1
N$102: LED1.C R48.2
N$103: Q12.3 R13.2 R16.2 R18.2 R20.2
N$104: IC8.17 J3.3
N$105: IC8.16 J3.1
N$106: IC8.30 J6.3
N$107: IC8.31 J6.2 R48.1
N$108: IC27.30 J7.3
N$109: IC27.31 J7.2
N$110: C2.2 D21.A L7.P$1 P5.P$5
N$111: C5.2 D16.A L8.P$1 P5.P$3
N$112: F1.P$2 IC1.4 R21.1
N$113: C6.2 D17.A L9.P$1 P5.P$15
N$114: C3.2 D15.A L6.P$1 P5.P$17
N$115: F3.P$2 IC3.2
N$116: D1.P$2 F1.P$3 P5.P$19
N$117: D2.P$2 F2.P$3 P5.P$7
N$118: IC15.7 L7.P$2
N$119: C4.2 D14.A L4.P$1 P5.P$4
N$120: D19.P$2 F4.P$3 P5.P$18
N$121: D13.P$2 F3.P$3 P5.P$6
N$122: L5.P$2
N$123: J4.2 L9.P$2
N$125: J2.2 L6.P$2
N$126: J5.2 L8.P$2
N$127: C1.2 D20.A L5.P$1 P5.P$20
N$128: IC14.13 Q4.1 R24.1
N$129: J5.3
N$130: J2.3
N$131: C32.2 IC16.3
N$132: C64.1 IC28.8 IC28.9
N$133: IC27.1 Q31.1
N$136: C73.2 R140.1
N$137: C74.2 IC29.6 R136.1 R140.2
N$138: IC29.7 R141.1 R142.2 R144.1
N$139: C73.1 IC28.6 IC28.7
N$141: IC27.2 Q30.1
N$143: C32.1 IC16.1
N$144: C34.1 IC16.4
N$145: C34.2 IC16.5
N$146: C33.1 IC16.2
N$147: C35.1 IC16.6
N$148: D5.3 P4.1 Q9.3 R28.2
N$149: Q11.3 R51.1
N$150: IC17.8 R94.1
N$151: IC17.7 R92.2 R93.1
N$152: Q9.1 R28.1 R51.2
N$153: D5.1 Q11.1 R52.2
N$155: IC22.1 Q15.3 R105.1
N$156: IC22.7 Q15.4
N$157: IC6.5 R60.1
N$158: IC22.2 R102.1
N$159: C52.1 R102.2
N$160: L11.1 Q15.5 Q15.6 Q15.7 Q15.8
N$161: C53.1 IC22.4
N$162: C54.1 IC22.3 R103.1 R104.2
N$163: IC6.1 R49.1
N$164: IC6.9 R17.1
N$165: IC6.11 R15.1
N$166: IC6.13 R14.1
N$167: IC14.3 R80.1 R87.1
N$168: IC14.5 R86.1 R89.1
N$170: IC14.6 P7.40
N$171: IC17.27 X1.3
N$172: IC17.28 X1.1
N$173: IC23.1 X2.1
N$174: IC23.2 X2.4
N$175: G1.+ IC23.3
PROD_COND_OUTPUT: IC20.5 IC29.13 R123.2 R127.1
PROD_COND_SENSOR_A: D29.3 P6.P$41 R132.1
PROD_COND_SENSOR_B: P6.P$19 R27.2
PROD_TEMP_A: P6.P$20 R72.1 R79.1 R85.2
PROD_TEMP_B: K5.7 P6.P$42
PROD_TEMP_SIM_EN: IC8.10 Q10.1
PRODUCT_FLOW_DETECT: P7.38 R50.2
PRODUCT_FLOW_DETECT_IN: IC6.3 IC27.16 J8.1 R5.2
PRODUCT_FLOW_PULS_IN: C61.2 IC27.15 J8.4 P6.P$33 R15.2 R62.1 R129.1
PRODUCT_FLOW_PULSE: IC6.10 IC20.11
PRODUCT_TEMP: IC8.24 IC10.7 R70.2
R: IC7.4 IC11.3 R43.2
REF: C13.2 IC8.20 IC12.5 R31.1 R81.1 R85.1
REJECT_SOLENOID: IC8.7 Q5.2 R35.2
REJECT_SOLENOID_DRIVE: D7.A P6.P$25 Q5.7 Q5.8
REJECT_TEMP: IC8.23 IC10.1 R67.2
REJECT_TEMP_A: P6.P$22 R81.2 R82.1 R83.1
REJECT_TEMP_B: K6.7 P6.P$44
REJECT_TEMP_SIM_EN: IC8.11 Q14.1
RELAY_24V: IC27.8 Q29.1
RETURN_SOLENOID: IC8.8 Q8.2 R42.2
RETURN_SOLENOID_DRIVE: D6.A P6.P$26 Q8.7 Q8.8
RETURN_TEMP: IC8.25 IC10.8 R57.2
RETURN_TEMP_A: P6.P$21 R31.2 R39.1
RETURN_TEMP_B: C10.2 P6.P$43 R41.1 R54.1
RO_PUMP_RELAY: IC8.14 Q2.1 Q6.4 R4.1
RO_PUMP_RELAY_DRIVE: D10.A P3.28 Q6.5 Q6.6
RX0: IC11.2 P7.42
SENSOR_LED_ENABLE: P7.26 R44.1
SPARE_VALVE_SOLENOID: IC8.32 Q6.2 R37.2
SPARE_VALVE_SOLENOID_DRIVE: D11.A P3.29 Q6.7 Q6.8
TANK_EMPTY: IC6.8 P7.112
TANK_EMPTY_IN: P6.P$31 R17.2 R63.1
TANK_EMPTY_LED: P6.P$32 R16.1
TANK_HIGH: IC6.6 P7.115
TANK_HIGH_IN: P6.P$27 R60.2 R64.1
TANK_HIGH_LED: P6.P$28 R20.1
TANK_LOW: IC6.2 P7.22
TANK_LOW_IN: P6.P$29 R19.1 R49.2
TANK_LOW_LED: P6.P$30 R18.1
TX0: P7.43 R23.1
V5_SOLENOID: IC8.1 Q5.4 R34.2
V5_SOLENOID_DRIVE: D12.A P3.30 Q5.5 Q5.6
VCC: C41.1 C42.1 C44.1 C46.+ C49.1 C50.1 C55.2 IC18.11 IC18.14 IC19.1 IC22.8 J6.1 J7.1 L1.1 P3.6 P3.8 P3.10 P6.P$6 P6.P$8 P6.P$10 P6.P$12 P6.P$34 P6.P$39 P7.70 P7.71 P7.142 P7.143 P8.P$15 P8.P$18 Q12.2 R19.2 R45.2 R61.2 R62.2 R63.2 R105.2
VCC_FT: C37.2 IC17.3 IC17.13 IC17.14 IC17.26 L10.1
XXB: IC6.4 P8.P$13 R50.1
XXC: D30.C P8.P$5 Q32.1
XXD: IC8.13 Q1.1
ZE0V: C1.1 C2.1 C3.1 C4.1 C5.1 C6.1 C16.1 C25.2 C28.2 C37.1 C38.2 C43.2 C47.1 C51.1 D1.P$1 D2.P$1 D13.P$1 D14.C D15.C D16.C D17.C D19.P$1 D20.C D21.C F1.P$1 F2.P$1 F3.P$1 F4.P$1 IC1.3 IC2.3 IC9.3 IC13.7 IC15.15 IC17.9 IC17.17 IC17.18 IC17.19 IC17.20 IC17.22 IC17.29 IC17.31 IC19.10 IC19.15 IC21.5 L2.P$1 R58.2 R90.1 X1.2
ZE5V: C16.2 C24.2 C25.1 C47.2 C51.2 IC7.1 IC13.8 IC13.9 IC13.11 IC13.12 IC13.14 IC15.11 IC15.13 IC15.16 IC19.12 IC19.13 IC21.6 IC21.8 J1.1 J1.3 L10.2 R29.2 R36.2 R53.2 R65.2 R91.2 R96.2

## Tracks (layer width: path | path; a pad name or v marks a point on that pad's centre or on a via)
0V  (198 unrouted)
+3V3  (57 unrouted)
+5V  (11 unrouted)
+24S  (23 unrouted)
+24V  (14 unrouted)
-5V  (7 unrouted)
AK_ACL  (1 unrouted)
AK_ADA  (1 unrouted)
AK_WAK  (1 unrouted)
AK_WDA  (1 unrouted)
ARM9_RESET  (2 unrouted)
BYPASS_SOLENOID  (2 unrouted)
BYPASS_SOLENOID_DRIVE  (3 unrouted)
CHEM_LED  (1 unrouted)
CHEM_PUMP_SOLENOID  (1 unrouted)
CHEM_TUBE  (1 unrouted)
CHEM_TUBE_IN  (2 unrouted)
CLEAN_CART_SW1  (1 unrouted)
CLEAN_CART_SW2  (1 unrouted)
COND_ADDR0  (1 unrouted)
COND_ADDR1  (1 unrouted)
COND_CAP1  (1 unrouted)
COND_CAP3  (1 unrouted)
COND_CAP5  (1 unrouted)
COND_CAP7  (1 unrouted)
COND_SENSOR_1_OUTPUT  (3 unrouted)
COND_SENSOR_1A  (2 unrouted)
COND_SENSOR_1B  (1 unrouted)
COND_SENSOR_2_OUTPUT  (3 unrouted)
COND_SENSOR_2A  (2 unrouted)
COND_SENSOR_2B  (1 unrouted)
DISPLAY_RXD  (1 unrouted)
DISPLAY_TXD  (1 unrouted)
EXTERNAL_OUTPUT  (1 unrouted)
FLOW1_FREQ  (1 unrouted)
FREQ_PULSE1  (1 unrouted)
FREQ_PULSE2  (1 unrouted)
HEATER_CLK  (1 unrouted)
HEATER_DI  (2 unrouted)
HEATER_DO  (1 unrouted)
HEATER_LOAD  (1 unrouted)
I2C_CLOCK  (7 unrouted)
I2C_DATA  (7 unrouted)
INLET_COND_OUTPUT  (3 unrouted)
INLET_COND_SENSOR_A  (2 unrouted)
INLET_COND_SENSOR_B  (1 unrouted)
INLET_SOLENOID  (3 unrouted)
INLET_VALVE_SOLENOID_DRIVE  (5 unrouted)
IOU_RESET  (2 unrouted)
MODULE_PRESSURE  (2 unrouted)
MODULE_TEMP  (2 unrouted)
MOTOR_PULSE  (1 unrouted)
MOTOR_SPEED_OUT  (1 unrouted)
MOTOR_START_OUT  (1 unrouted)
N$1  (1 unrouted)
N$2  (1 unrouted)
N$3  (1 unrouted)
N$4  (5 unrouted)
N$5  (1 unrouted)
N$6  (3 unrouted)
N$7  (3 unrouted)
N$8  (1 unrouted)
N$9  (2 unrouted)
N$10  (1 unrouted)
N$11  (2 unrouted)
N$12  (3 unrouted)
N$13  (1 unrouted)
N$14  (1 unrouted)
N$15  (1 unrouted)
N$16  (1 unrouted)
N$17  (1 unrouted)
N$18  (1 unrouted)
N$19  (3 unrouted)
N$20  (3 unrouted)
N$21  (1 unrouted)
N$22  (2 unrouted)
N$23  (1 unrouted)
N$24  (1 unrouted)
N$25  (2 unrouted)
N$26  (2 unrouted)
N$27  (1 unrouted)
N$28  (3 unrouted)
N$29  (2 unrouted)
N$30  (3 unrouted)
N$31  (2 unrouted)
N$32  (3 unrouted)
N$33  (2 unrouted)
N$34  (3 unrouted)
N$36  (1 unrouted)
N$37  (2 unrouted)
N$38  (2 unrouted)
N$39  (3 unrouted)
N$41  (1 unrouted)
N$42  (1 unrouted)
N$43  (3 unrouted)
N$44  (1 unrouted)
N$45  (1 unrouted)
N$46  (5 unrouted)
N$47  (3 unrouted)
N$48  (1 unrouted)
N$49  (2 unrouted)
N$50  (2 unrouted)
N$51  (3 unrouted)
N$52  (2 unrouted)
N$53  (2 unrouted)
N$54  (1 unrouted)
N$55  (2 unrouted)
N$56  (1 unrouted)
N$57  (3 unrouted)
N$58  (1 unrouted)
N$59  (1 unrouted)
N$60  (1 unrouted)
N$61  (1 unrouted)
N$62  (1 unrouted)
N$63  (1 unrouted)
N$64  (1 unrouted)
N$65  (2 unrouted)
N$66  (3 unrouted)
N$67  (2 unrouted)
N$68  (2 unrouted)
N$69  (1 unrouted)
N$70  (3 unrouted)
N$71  (1 unrouted)
N$72  (1 unrouted)
N$73  (1 unrouted)
N$74  (1 unrouted)
N$75  (1 unrouted)
N$78  (1 unrouted)
N$79  (2 unrouted)
N$80  (2 unrouted)
N$81  (1 unrouted)
N$82  (1 unrouted)
N$83  (1 unrouted)
N$84  (3 unrouted)
N$85  (2 unrouted)
N$86  (2 unrouted)
N$87  (2 unrouted)
N$88  (1 unrouted)
N$89  (1 unrouted)
N$90  (2 unrouted)
N$91  (3 unrouted)
N$92  (1 unrouted)
N$93  (2 unrouted)
N$94  (1 unrouted)
N$95  (1 unrouted)
N$96  (1 unrouted)
N$97  (3 unrouted)
N$98  (2 unrouted)
N$99  (2 unrouted)
N$100  (1 unrouted)
N$101  (4 unrouted)
N$102  (1 unrouted)
N$103  (4 unrouted)
N$104  (1 unrouted)
N$105  (1 unrouted)
N$106  (1 unrouted)
N$107  (2 unrouted)
N$108  (1 unrouted)
N$109  (1 unrouted)
N$110  (3 unrouted)
N$111  (3 unrouted)
N$112  (2 unrouted)
N$113  (3 unrouted)
N$114  (3 unrouted)
N$115  (1 unrouted)
N$116  (2 unrouted)
N$117  (2 unrouted)
N$118  (1 unrouted)
N$119  (3 unrouted)
N$120  (2 unrouted)
N$121  (2 unrouted)
N$123  (1 unrouted)
N$125  (1 unrouted)
N$126  (1 unrouted)
N$127  (3 unrouted)
N$128  (2 unrouted)
N$131  (1 unrouted)
N$132  (2 unrouted)
N$133  (1 unrouted)
N$136  (1 unrouted)
N$137  (3 unrouted)
N$138  (3 unrouted)
N$139  (2 unrouted)
N$141  (1 unrouted)
N$143  (1 unrouted)
N$144  (1 unrouted)
N$145  (1 unrouted)
N$146  (1 unrouted)
N$147  (1 unrouted)
N$148  (3 unrouted)
N$149  (1 unrouted)
N$150  (1 unrouted)
N$151  (2 unrouted)
N$152  (2 unrouted)
N$153  (2 unrouted)
N$155  (2 unrouted)
N$156  (1 unrouted)
N$157  (1 unrouted)
N$158  (1 unrouted)
N$159  (1 unrouted)
N$160  (4 unrouted)
N$161  (1 unrouted)
N$162  (3 unrouted)
N$163  (1 unrouted)
N$164  (1 unrouted)
N$165  (1 unrouted)
N$166  (1 unrouted)
N$167  (2 unrouted)
N$168  (2 unrouted)
N$170  (1 unrouted)
N$171  (1 unrouted)
N$172  (1 unrouted)
N$173  (1 unrouted)
N$174  (1 unrouted)
N$175  (1 unrouted)
PROD_COND_OUTPUT  (3 unrouted)
PROD_COND_SENSOR_A  (2 unrouted)
PROD_COND_SENSOR_B  (1 unrouted)
PROD_TEMP_A  (3 unrouted)
PROD_TEMP_B  (1 unrouted)
PROD_TEMP_SIM_EN  (1 unrouted)
PRODUCT_FLOW_DETECT  (1 unrouted)
PRODUCT_FLOW_DETECT_IN  (3 unrouted)
PRODUCT_FLOW_PULS_IN  (6 unrouted)
PRODUCT_FLOW_PULSE  (1 unrouted)
PRODUCT_TEMP  (2 unrouted)
R  (2 unrouted)
REF  (5 unrouted)
REJECT_SOLENOID  (2 unrouted)
REJECT_SOLENOID_DRIVE  (3 unrouted)
REJECT_TEMP  (2 unrouted)
REJECT_TEMP_A  (3 unrouted)
REJECT_TEMP_B  (1 unrouted)
REJECT_TEMP_SIM_EN  (1 unrouted)
RELAY_24V  (1 unrouted)
RETURN_SOLENOID  (2 unrouted)
RETURN_SOLENOID_DRIVE  (3 unrouted)
RETURN_TEMP  (2 unrouted)
RETURN_TEMP_A  (2 unrouted)
RETURN_TEMP_B  (3 unrouted)
RO_PUMP_RELAY  (3 unrouted)
RO_PUMP_RELAY_DRIVE  (3 unrouted)
RX0  (1 unrouted)
SENSOR_LED_ENABLE  (1 unrouted)
SPARE_VALVE_SOLENOID  (2 unrouted)
SPARE_VALVE_SOLENOID_DRIVE  (3 unrouted)
TANK_EMPTY  (1 unrouted)
TANK_EMPTY_IN  (2 unrouted)
TANK_EMPTY_LED  (1 unrouted)
TANK_HIGH  (1 unrouted)
TANK_HIGH_IN  (2 unrouted)
TANK_HIGH_LED  (1 unrouted)
TANK_LOW  (1 unrouted)
TANK_LOW_IN  (2 unrouted)
TANK_LOW_LED  (1 unrouted)
TX0  (1 unrouted)
V5_SOLENOID  (2 unrouted)
V5_SOLENOID_DRIVE  (3 unrouted)
VCC  (35 unrouted)
VCC_FT  (5 unrouted)
XXB  (2 unrouted)
XXC  (2 unrouted)
XXD  (1 unrouted)
ZE0V  (47 unrouted)
ZE5V  (26 unrouted)